# Altium PCB PCB.PcbDoc (part 2 of 2)
Units mm, origin at the board's own origin, x right, y up, seen from the top; angles counter-clockwise.
Board outline 43.18 x 17.78 mm, 4 copper layers (TOP, GND, SIG, BOTTOM), stack 1.586 mm thick; 70 components, 66 nets, 305 pads, 129 vias.
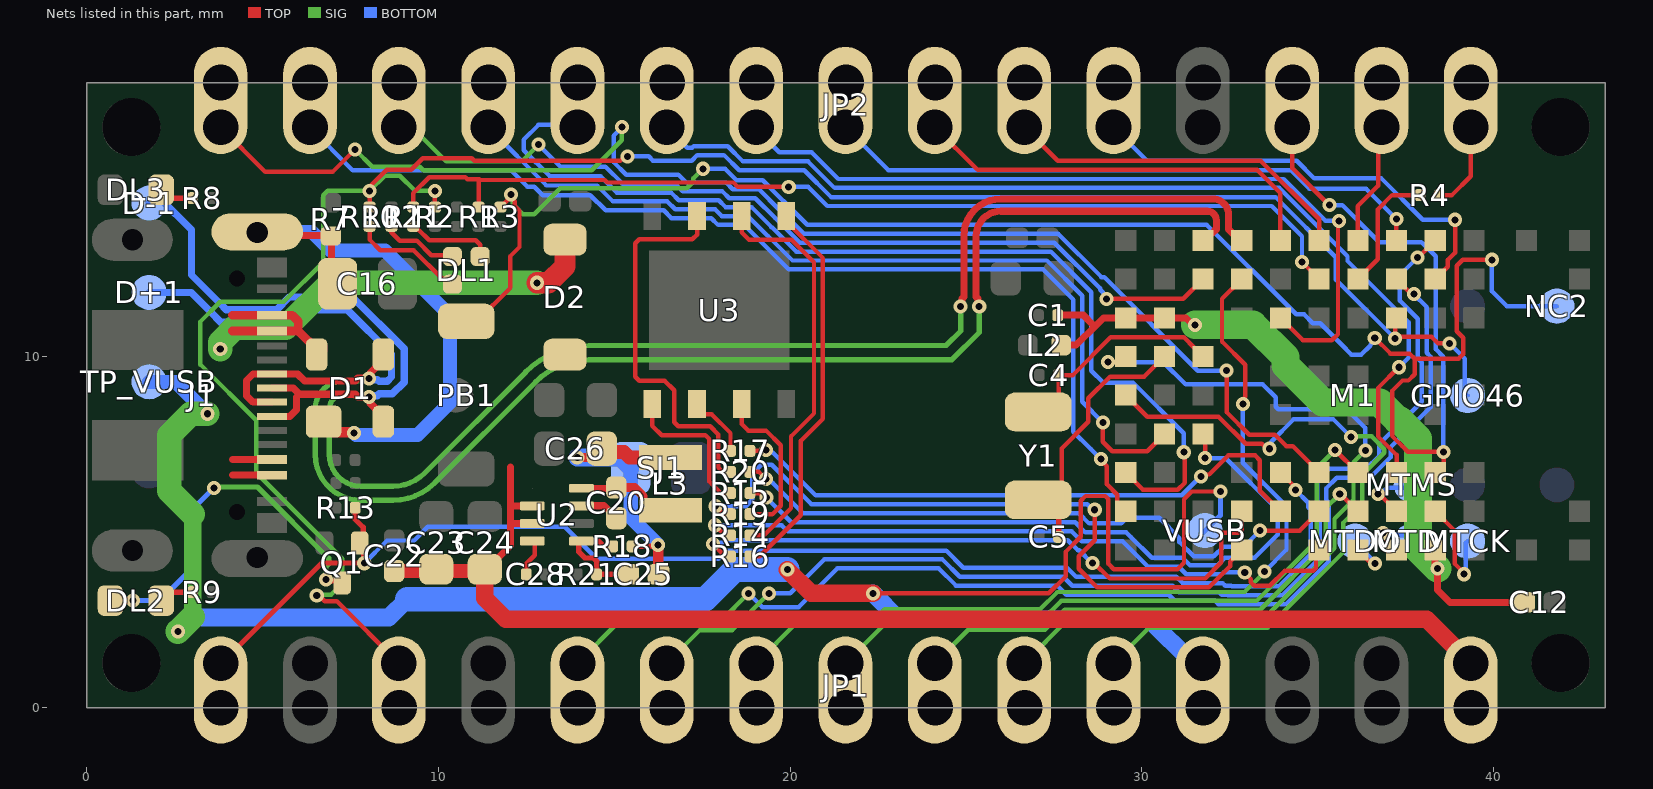
[diagram p4: the nets of this part, all layers, seen from the top]

## Via types
v1: diameter 0.4, hole 0.2, TOP to BOTTOM, tented both sides, 129 vias

## Nets (pads, with @x,y where several pads share a name; then routed paths per layer and width w, separated by ;. In a path a pad name is that pad's centre, name@x,y a point inside that pad or via, vN(x,y) a via of type N, cw(c..) or ccw(c..) an arc to the next point about the centre after c; other vN are vias at no path point) (continued)
GPIO2_1: JP1.5 M1.H8 | length 34
  TOP w0.127: M1.H8@37.243,12.19 37.668,11.764 v1(37.735,11.764)
  SIG w0.127: JP1.5@13.955,1.27 15.176,2.491 18.053,2.491 v1(18.818,3.256)
  BOTTOM w0.127: v1(18.818,3.256) 19.209,2.865 20.244,2.865 21.344,3.965 24.227,3.965 24.715,3.478 27.598,3.478 27.856,3.22 28.222,3.22 28.225,3.216 28.969,3.216 28.973,3.22 30.77,3.22 30.95,3.04 32.085,3.04 32.173,2.952 34.111,2.952 35.316,4.156 35.316,5.837 35.238,5.915 35.238,6.238 35.54,6.54 36.488,6.54 37.08,7.132 37.08,7.415 38.21,8.545 38.21,9.988 38.103,10.095 38.103,11.396 v1(37.735,11.764)
GPIO3_1: JP1.6 M1.J9 | length 32.2
  TOP w0.127: v1(37.84,12.807) 37.859,12.807 M1.J9@38.343,13.29
  SIG w0.127: JP1.6@16.495,1.27 17.438,2.213 18.358,2.213 v1(19.401,3.256)
  BOTTOM w0.127: v1(19.401,3.256) 20.008,3.256 20.972,4.219 24.333,4.219 24.82,3.732 27.768,3.732 28.026,3.474 28.327,3.474 28.33,3.47 28.864,3.47 28.868,3.474 30.875,3.474 31.055,3.294 32.191,3.294 32.268,3.216 32.436,3.216 32.446,3.206 34.005,3.206 35.062,4.262 35.062,5.732 34.984,5.81 34.984,6.462 35.316,6.794 36.383,6.794 36.747,7.158 36.747,7.494 37.956,8.704 37.956,9.831 37.892,9.895 37.892,9.948 37.849,9.99 37.849,11.064 37.34,11.574 37.34,12.306 v1(37.84,12.807)
GPIO4_1: JP1.7 M1.D8 | length 25.2
  TOP w0.127: M1.D8@32.843,12.19 32.281,11.628 32.281,10.415 32.937,9.758 32.937,8.847 32.926,8.837 32.926,8.689 v1(32.874,8.637)
  SIG w0.127: JP1.7@19.035,1.27 20.212,2.447 22.335,2.447 22.687,2.8 27.107,2.8 27.601,3.294 32.923,3.294 33.486,3.857 v1(33.486,3.872)
  BOTTOM w0.127: v1(32.874,8.637) 32.874,6.971 34.114,5.731 34.114,4.5 v1(33.486,3.872)
GPIO5_1: JP2.5 M1.J8 | length 12.7
  TOP w0.127: M1.J8@38.343,12.19 38.698,12.545 38.698,12.735 38.906,12.943 38.906,13.871 v1(38.9,13.877)
  BOTTOM w0.127: JP2.5@29.195,16.51 30.147,15.557 34.402,15.557 34.907,15.053 36.814,15.053 37.99,13.877 v1(38.9,13.877)
GPIO6_1: JP2.6 M1.F9 | length 10.1
  TOP w0.127: JP2.6@26.655,16.51 27.607,15.557 33.376,15.557 35.043,13.891 M1.F9@35.043,13.29
GPIO7_1: JP2.7 M1.E9 | length 12
  TOP w0.127: JP2.7@24.115,16.51 25.332,15.293 33.281,15.293 33.943,14.632 M1.E9@33.943,13.29
  BOTTOM w0.127: JP2.7@24.115,16.51 JP2.7@24.169,16.51
GPIO8_1: JP2.8 M1.H9 | length 17.4
  TOP w0.127: v1(37.238,13.901) 37.238,13.294 M1.H9@37.243,13.29
  BOTTOM w0.127: JP2.8@21.575,16.51 22.523,15.562 22.795,15.29 34.231,15.29 34.767,14.754 36.386,14.754 v1(37.238,13.901)
GPIO9_1: JP2.9 M1.E7 | length 22.9
  TOP w0.127: M1.E7@33.943,11.09 34.582,10.451 35.403,10.451 35.579,10.627 35.579,13.812 v1(35.605,13.839)
  BOTTOM w0.127: JP2.9@19.035,16.51 19.035,16.453 19.691,15.796 20.611,15.796 21.371,15.036 34.034,15.036 35.215,13.855 35.589,13.855 v1(35.605,13.839)
GPIO10_1: JP2.10 M1.H3 | length 28.4
  TOP w0.127: M1.H3@37.243,6.69 37.243,7.192 36.718,7.716 36.718,9.094 v1(37.308,9.684)
  BOTTOM w0.127: JP2.10@16.495,16.51 17.079,15.926 17.213,15.926 17.259,15.972 18.226,15.972 18.661,15.537 20.511,15.537 21.266,14.782 33.904,14.782 35.849,12.837 35.849,12.706 37.595,10.959 37.595,9.971 v1(37.308,9.684)
GPIO11_1: JP1.8 M1.G3 | length 18.5
  TOP w0.127: v1(35.488,7.329) 35.504,7.329 M1.G3@36.143,6.69
  SIG w0.127: JP1.8@21.575,1.27 22.781,2.476 27.143,2.476 27.706,3.04 33.261,3.04 34.971,4.75 34.971,6.812 v1(35.488,7.329)
GPIO12_1: JP1.9 M1.G2 | length 14.8
  TOP w0.127: v1(35.629,6.077) 35.656,6.077 M1.G2@36.143,5.59
  SIG w0.127: JP1.9@24.115,1.27 25.067,2.222 27.248,2.222 27.812,2.786 33.366,2.786 35.225,4.644 35.225,5.673 v1(35.629,6.077)
GPIO13_1: JP1.10 M1.A6 | length 22.8
  TOP w0.127: v1(29.034,9.829) 29.382,9.829 M1.A6@29.543,9.99
  SIG w0.127: JP1.10@26.655,1.27 27.917,2.532 33.471,2.532 35.479,4.539 35.479,5.375 36.019,5.915 36.019,6.983 v1(36.356,7.32)
  BOTTOM w0.127: v1(29.034,9.829) 30.614,9.829 31.248,9.195 33.441,9.195 33.807,8.829 33.807,8.565 33.883,8.49 35.824,8.49 36.356,7.958 v1(36.356,7.32)
GPIO14_1: JP1.11 M1.A5 | length 20
  TOP w0.127: M1.A5@29.543,8.89 30.152,8.281 32.181,8.281 32.953,7.508 33.417,7.508 33.558,7.367 v1(33.628,7.367)
  SIG w0.127: JP1.11@29.195,1.27 30.203,2.278 33.577,2.278 35.733,4.434 35.733,5.269 36.273,5.81 36.273,6.625 36.897,7.249 36.897,7.355 36.533,7.719 35.969,7.719 v1(35.949,7.7)
  BOTTOM w0.127: v1(33.628,7.367) 33.68,7.42 33.68,7.567 34.312,8.199 35.449,8.199 v1(35.949,7.7)
GPIO17_1: JP2.11 M1.A3 | length 28.8
  TOP w0.127: M1.A3@29.543,6.69 30.033,6.2 31.021,6.2 31.217,6.396 31.217,7.244 v1(31.194,7.268)
  BOTTOM w0.127: JP2.11@13.955,16.51 13.891,16.573 12.846,16.573 12.43,16.158 12.43,15.854 13.173,15.111 14.611,15.111 15.07,14.652 16.615,14.652 16.838,14.429 17.973,14.429 18.164,14.238 18.904,14.238 19.471,13.671 19.476,13.671 20.174,12.973 27.408,12.973 28.562,11.82 28.562,11.412 28.562,9.588 28.9,9.25 29.75,9.25 31.194,7.806 v1(31.194,7.268)
GPIO18_1: JP2.12 M1.B4 | length 25.3
  TOP w0.127: v1(28.893,8.115) 28.893,7.567 29.161,7.3 30.152,7.3 M1.B4@30.643,7.79
  BOTTOM w0.127: JP2.12@11.415,16.51 13.073,14.852 14.511,14.852 14.965,14.398 16.51,14.398 16.733,14.175 17.868,14.175 18.059,13.984 18.799,13.984 19.366,13.417 19.371,13.417 20.069,12.719 27.303,12.719 28.308,11.714 28.308,11.307 28.308,8.701 v1(28.893,8.115)
GPIO21_1: JP2.13 M1.C8 | length 25.8
  TOP w0.127: JP2.13@8.875,16.51 9.064,16.51 JP2.13@9.106,16.467 ; v1(28.997,11.629) 31.182,11.629 M1.C8@31.743,12.19
  SIG w0.127: JP2.13@8.875,16.51 8.985,16.4 9.359,16.4 10.219,15.541 12.377,15.541 12.843,16.006 v1(12.843,16.018)
  BOTTOM w0.127: v1(12.843,16.018) 13.472,15.389 14.752,15.389 15.235,14.906 16.72,14.906 16.943,14.683 18.078,14.683 18.269,14.492 19.01,14.492 19.576,13.925 19.581,13.925 20.28,13.227 27.514,13.227 28.816,11.925 28.816,11.884 28.997,11.703 v1(28.997,11.629)
GPIO27_1: M1.F2 R20.1 | length 17.9
  TOP w0.127: R20.1@18.857,6.707 19.114,6.707 v1(19.318,6.504) ; v1(33.363,5.041) 34.494,5.041 M1.F2@35.043,5.59
  BOTTOM w0.127: v1(19.318,6.504) 19.391,6.504 19.5,6.395 19.507,6.395 20.367,5.535 28.207,5.535 28.5,5.243 29.417,5.243 29.579,5.404 30.496,5.404 31.071,4.829 31.071,4.714 31.476,4.31 32.048,4.31 32.323,4.584 32.906,4.584 v1(33.363,5.041)
GPIO28_1: M1.D1 R19.1 | length 20
  TOP w0.127: v1(17.882,5.733) 18.108,5.507 R19.1@18.307,5.507 ; v1(28.662,5.633) 28.662,4.765 28.207,4.31 28.207,3.953 28.735,3.424 31.905,3.424 32.513,4.032 32.513,4.161 M1.D1@32.843,4.49
  BOTTOM w0.127: v1(17.882,5.733) 18.742,5.733 18.927,5.918 18.927,6.665 19.178,6.916 19.481,6.916 20.608,5.789 28.445,5.789 28.602,5.633 v1(28.662,5.633)
GPIO29_1: M1.C4 R15.1 | length 20.3
  TOP w0.127: R15.1@18.857,6.107 19.126,6.107 19.258,5.976 v1(19.332,5.976) ; M1.C4@31.743,7.79 31.8,7.733 v1(31.8,7.1)
  BOTTOM w0.127: v1(19.332,5.976) 20.033,5.275 28.108,5.275 28.395,4.989 29.559,4.989 29.695,4.852 ; 29.695,4.852 30.279,4.267 31.159,4.267 31.371,4.056 32.153,4.056 32.365,4.267 33.206,4.267 33.86,4.921 33.86,5.626 32.385,7.1 v1(31.8,7.1)
GPIO30_1: M1.F1 R14.1 | length 19.2
  TOP w0.127: v1(17.871,5.191) 18.088,4.974 18.239,4.974 R14.1@18.307,4.907 ; v1(32.927,3.85) 32.927,3.832 33.104,3.655 33.104,3.565 33.194,3.475 33.642,3.475 34.059,3.892 34.879,3.892 34.953,3.967 34.953,4.401 M1.F1@35.043,4.49
  BOTTOM w0.127: v1(17.871,5.191) 19.757,5.191 19.928,5.021 28.003,5.021 28.289,4.735 29.453,4.735 30.174,4.013 31.054,4.013 31.266,3.802 32.279,3.802 32.328,3.851 v1(32.927,3.85) ; v1(32.927,3.85) v1(32.927,3.85)
GPIO31_1: M1.E2 R17.1 | length 17.3
  TOP w0.127: R17.1@18.857,7.307 18.866,7.317 19.308,7.317 v1(19.318,7.326) ; v1(31.68,6.583) 31.732,6.635 31.918,6.635 32.464,7.181 33.221,7.181 33.358,7.044 33.358,6.175 M1.E2@33.943,5.59
  BOTTOM w0.127: v1(19.318,7.326) 19.37,7.274 19.494,7.274 20.725,6.043 31.14,6.043 v1(31.68,6.583)
GPIO32_1: M1.D2 R16.1 | length 17.7
  TOP w0.127: v1(17.812,4.661) 17.812,4.655 18.082,4.385 18.228,4.385 R16.1@18.307,4.307 ; v1(28.597,4.115) 28.65,4.115 29.086,3.678 31.8,3.678 32.259,4.137 32.259,4.94 32.3,4.981 32.768,4.981 32.843,5.055 M1.D2@32.843,5.59
  BOTTOM w0.127: v1(17.812,4.661) 17.851,4.7 18.076,4.7 18.143,4.767 27.898,4.767 28.184,4.481 28.218,4.481 28.584,4.115 v1(28.597,4.115)
GPIO38_1: JP2.14 M1.A2 | length 30.4
  TOP w0.127: v1(28.837,7.071) 28.837,7.04 29.008,6.869 29.008,6.355 29.306,6.057 29.306,5.827 M1.A2@29.543,5.59
  BOTTOM w0.127: JP2.14@6.35,16.51 6.35,16.5 7.569,15.28 12.072,15.28 12.533,14.819 12.729,14.819 12.971,14.578 14.321,14.578 14.755,14.144 16.405,14.144 16.628,13.921 17.762,13.921 17.953,13.73 18.694,13.73 19.959,12.465 27.198,12.465 28.054,11.609 28.054,7.854 28.544,7.364 v1(28.837,7.071)
GPIO39_1: M1.J2 MTCK.X | length 3.1
  TOP w0.127: M1.J2@38.343,5.59 38.904,5.028 38.904,4.091 39.165,3.831 v1(39.165,3.8)
  BOTTOM w0.127: v1(39.165,3.8) 39.214,3.849 39.214,4.692 MTCK.X@39.263,4.741
GPIO40_1: M1.G1 MTDO.X | length 1.5
  TOP w0.127: M1.G1@36.143,4.49 36.471,4.162 36.573,4.162 v1(36.626,4.109)
  BOTTOM w0.127: MTDO.X@36.063,4.741 36.063,4.707 36.626,4.144 v1(36.626,4.109)
GPIO41_1: M1.H1 MTDI.X | length 1.4
  TOP w0.127: v1(36.862,4.973) 36.914,4.921 36.914,4.818 M1.H1@37.243,4.49
  BOTTOM w0.127: v1@37.001,4.908 37.496,4.908 MTDI.X@37.663,4.741
GPIO42_1: M1.H2 MTMS.X | length 1.8
  TOP w0.127: v1(36.712,6.075) 36.758,6.075 M1.H2@37.243,5.59
  BOTTOM w0.127: v1(36.712,6.075) 36.786,6.075 36.973,6.261 37.583,6.261 MTMS.X@37.663,6.341
GPIO43_1: M1.G8 R4.2 | length 3.6
  TOP w0.127: M1.G8@36.143,12.19 36.705,12.752 36.705,14.17 37.115,14.58 R4.2@37.906,14.58
GPIO44_1: JP2.2 M1.G9 | length 3.5
  TOP w0.127: M1.G9@36.143,13.29 36.143,14.268 36.724,14.85 36.724,16.419 JP2.2@36.815,16.51
GPIO45_1: M1.F8 R1.1 R11.1 | length 28.7
  TOP w0.127: R11.1@9.284,14.29 9.284,14.637 9.738,15.091 10.769,15.091 10.826,15.034 11.165,15.034 ; R1.1@11.144,14.24 11.144,15.008 14.731,15.008 14.802,14.937 18.389,14.937 18.515,14.811 v1(19.961,14.811) ; v1(34.555,12.678) M1.F8@35.043,12.19
  BOTTOM w0.127: v1(19.961,14.811) 20.518,14.811 21.06,14.269 33.699,14.269 34.555,13.413 v1(34.555,12.678)
GPIO46_1: GPIO46.X JP1.3 M1.H7 R2.1 R10.1 | length 59.8
  TOP w0.127: v1(6.543,3.199) 6.597,3.199 6.766,3.03 7.115,3.03 JP1.3@8.875,1.27 ; R10.1@8.044,14.39 8.044,14.815 8.529,15.3 9.229,15.3 9.556,15.626 10.952,15.626 11.02,15.557 12.652,15.557 12.659,15.55 15.168,15.55 15.298,15.68 v1(15.372,15.68) ; v1(9.9,14.7) 9.902,14.698 9.902,14.242 R2.1@9.904,14.24 ; v1(37.205,10.5) 37.205,11.052 M1.H7@37.243,11.09 ; v1@37.253,10.546 38.239,10.546 38.422,10.363 v1(38.748,10.363)
  SIG w0.127: v1(6.543,3.199) 6.559,3.215 6.948,3.215 7.27,3.537 7.27,4.238 4.819,6.689 4.819,8.178 3.236,9.761 3.236,10.984 3.799,11.547 5.599,11.547 6.724,12.672 6.724,14.571 6.853,14.7 v1(8.04,14.7) 8.472,15.132 8.905,15.132 9.337,14.7 v1(9.9,14.7)
  BOTTOM w0.127: v1(15.372,15.68) 15.978,15.68 16.1,15.557 17.203,15.557 17.364,15.718 18.121,15.718 18.556,15.283 20.406,15.283 21.165,14.523 33.804,14.523 35.518,12.809 35.518,12.178 37.197,10.5 v1(37.205,10.5) ; v1(38.748,10.363) 39.188,9.923 39.188,8.956 GPIO46.X@39.263,8.881
GPIO47_1: JP2.15 M1.F3 | length 38.7
  TOP w0.127: JP2.15@3.81,16.51 5.082,15.238 6.992,15.238 v1(7.629,15.875) ; v1(32.414,9.586) 32.42,9.58 32.42,8.4 33.058,7.762 33.785,7.762 34.104,7.444 34.289,7.444 M1.F3@35.043,6.69
  SIG w0.127: v1(7.629,15.875) 8.118,15.386 9.47,15.386 9.569,15.287 14.36,15.287 15.214,16.141 15.214,16.499 v1(15.225,16.51)
  BOTTOM w0.127: v1(15.225,16.51) 14.981,16.266 14.981,15.519 15.34,15.16 16.826,15.16 17.048,14.937 18.183,14.937 18.374,14.746 19.115,14.746 19.682,14.179 19.687,14.179 20.385,13.481 27.619,13.481 28.852,12.248 28.93,12.248 31.592,9.586 v1(32.414,9.586)
GPIO48_1: JP1.1 M1.E3 Q1.G R13.2 | length 38.2
  TOP w0.127: M1.E3@33.943,6.69 34.368,6.264 v1(34.368,6.192)
  TOP w0.15: JP1.1@3.81,1.27 3.833,1.27 6.683,4.12 v1@7.886,4.12 ; R13.2@7.637,5.69 7.637,5.36 7.862,5.134 7.862,4.69 7.881,4.671 7.881,4.125 v1@7.886,4.12 ; v1(7.894,4.112) v1@7.886,4.12
  BOTTOM w0.127: v1(7.894,4.112) 8.54,4.758 9.311,4.758 9.698,5.145 13.595,5.145 14.5,4.24 17.975,4.24 18.208,4.473 24.438,4.473 24.925,3.986 27.873,3.986 28.131,3.728 28.432,3.728 28.436,3.724 28.759,3.724 28.763,3.728 30.98,3.728 31.16,3.548 32.296,3.548 32.373,3.47 32.541,3.47 32.552,3.46 33.9,3.46 34.808,4.367 34.808,5.627 34.73,5.704 34.73,5.83 v1(34.368,6.192)
NetC1_2: C1.2 C12.2 L2.2 M1.A7 M1.B7 M1.J1 | length 20.9
  TOP w0.2: C1.2@27.61,11.164 28.338,11.164 28.611,10.89 28.71,10.89 ; L2.2@27.71,10.314 28.133,10.314 28.71,10.89 ; v1(31.514,10.891) 31.46,10.891 31.262,11.09 28.909,11.09 28.71,10.89 ; M1.J1@38.343,4.49 38.343,3.965 38.357,3.965 v1@38.373,3.949 ; v1(38.411,3.965) 38.411,3.353 38.764,3 C12.2@40.865,3
  SIG w0.8: v1(31.514,10.891) 33.162,10.891 34.083,9.97 34.083,9.742 35.144,8.681 36.766,8.681 37.265,8.182 37.326,8.182 37.856,7.652 37.856,4.52 v1(38.411,3.965)
NetC4_1: C4.1 M1.C6 Y1.2 | length 5.4
  TOP w0.127: Y1.2@27.635,8.839 C4.1@27.635,9.464 28.042,9.464 29.12,10.542 31.191,10.542 31.506,10.226 M1.C6@31.738,9.995
NetC5_1: C5.1 M1.B6 Y1.1 | length 6.7
  TOP w0.127: Y1.1@27.251,5.914 27.721,6.384 27.721,7.374 28.481,8.135 28.481,8.799 29.102,9.42 30.073,9.42 M1.B6@30.643,9.99
  TOP w0.15: C5.1@27.635,4.864 Y1.1@27.635,5.477
NetC20_1: C20.1 L3.1 U2.8 | length 2.9
  TOP w0.15: C20.1@14.8,6.236 14.893,6.33 C20.1@14.893,6.363
  TOP w0.2: U2.8@14.075,6.236 C20.1@14.8,6.236
  TOP w0.25: C20.1@14.893,6.363 14.994,6.263 15.579,6.263 15.823,6.019 15.823,5.843 16.048,5.618 L3.1@16.498,5.618
NetC20_2: C20.2 U2.7 | length 1.1
  TOP w0.2: U2.7@14.072,5.747 14.706,5.747 C20.2@15.059,5.393
NetC25_1: C25.1 R18.1 R21.2 U2.5 | length 3.2
  TOP w0.15: R18.1@14.959,4.593 14.71,4.593 14.56,4.743 13.993,4.743 13.993,4.432 14.166,4.259 14.412,4.259 14.5,4.172 R21.2@14.5,3.797 C25.1@15.39,3.797
NetC25_2: C25.2 C26.2 L3.2 R18.2 SJ1.1 | length 8.4
  TOP w0.15: R18.2@15.509,4.593 16.214,4.593 v1(16.251,4.63)
  TOP w0.25: v1(13.95,7.118) C26.2@14.648,7.118
  TOP w0.3: v1(16.251,4.63) 16.255,4.625 16.255,3.802 C25.2@16.26,3.797
  TOP w0.4: C26.2@14.648,7.468 14.845,7.271 15.283,7.271 15.436,7.118 L3.2@16.498,7.118
  BOTTOM w0.4: SJ1.1@15.47,6.82 15.47,5.411 v1(16.251,4.63)
  BOTTOM w0.5: v1(13.95,7.118) 15.172,7.118 SJ1.1@15.47,6.82
NetC28_2: C28.2 U2.4 | length 1
  TOP w0.127: C28.2@12.5,3.797 12.5,4.1 12.743,4.343 U2.4@12.743,4.743
NetDL1_2: DL1.2 R10.2 | length 3.3
  TOP w0.127: R10.2@8.044,13.69 8.044,13.315 8.344,13.015 9.295,13.015 10.106,12.204 10.24,12.204 DL1.2@10.399,12.045
NetDL1_3: DL1.3 R12.2 | length 2.2
  TOP w0.127: R12.2@8.664,13.74 8.664,13.521 8.905,13.28 9.391,13.28 9.802,12.869 10.383,12.869 DL1.3@10.395,12.881
NetDL1_4: DL1.4 R11.2 | length 2.4
  TOP w0.127: R11.2@9.284,13.69 9.365,13.609 9.421,13.609 9.737,13.293 10.061,13.293 10.064,13.296 11.062,13.296 11.189,13.169 DL1.4@11.189,12.885
NetDL2_A: DL2.A R9.1 | length 1
  TOP w0.15: DL2.A@2.125,3.05 2.365,3.29 R9.1@3.016,3.29
NetDL2_C: DL2.C Q1.D | length 10.4
  TOP w0.15: v1(6.807,3.654) 6.855,3.607 7.183,3.607 Q1.D@7.227,3.651
  TOP w0.2: DL2.C@0.675,3.05 v1(1.317,3.05)
  SIG w0.15: v1(3.615,6.252) 3.641,6.277 4.855,6.277 6.88,4.253 6.88,4.095 6.807,4.022 v1(6.807,3.654)
  BOTTOM w0.15: v1(1.317,3.05) 2.081,3.05 3.054,4.023 3.054,5.69 v1(3.615,6.252)
NetDL3_A: DL3.A R8.1 | length 1
  TOP w0.15: DL3.A@2.125,14.73 2.365,14.49 R8.1@3.015,14.49
NetJP2_1: JP2.1 R4.1 | length 2.5
  TOP w0.127: R4.1@38.456,14.58 38.819,14.58 39.355,15.116 JP2.1@39.355,16.51
NetR14_2: R14.2 U3.6 | length 11.6
  TOP w0.127: U3.6@18.624,13.98 18.624,13.516 18.832,13.308 20.042,13.308 20.681,12.67 20.681,8.371 20.026,7.717 20.026,5.676 19.258,4.907 R14.2@18.857,4.907
NetR15_2: R15.2 U3.1 | length 4.3
  TOP w0.127: U3.1@16.084,8.64 16.084,8.016 16.348,7.752 17.594,7.752 17.704,7.642 17.704,6.439 18.036,6.107 R15.2@18.307,6.107
NetR16_2: R16.2 U3.5 | length 11.1
  TOP w0.127: R16.2@18.857,4.307 19.136,4.307 20.303,5.474 20.303,7.589 20.935,8.221 20.935,12.79 19.894,13.83 U3.5@19.894,13.98
NetR17_2: R17.2 U3.2 | length 1.9
  TOP w0.127: U3.2@17.354,8.64 17.354,8.53 17.541,8.343 17.776,8.343 18.307,7.813 R17.2@18.307,7.307
NetR19_2: R19.2 U3.3 | length 4.6
  TOP w0.127: U3.3@18.624,8.64 18.624,8.071 18.811,7.884 19.316,7.884 19.735,7.466 19.735,5.743 19.499,5.507 R19.2@18.857,5.507
NetR20_2: R20.2 U3.7 | length 11.1
  TOP w0.127: U3.7@17.354,13.98 17.354,13.454 17.221,13.321 15.709,13.321 15.598,13.209 15.598,9.416 15.709,9.304 16.431,9.304 16.706,9.03 16.706,8.118 16.817,8.006 17.726,8.006 17.96,7.772 17.96,6.835 18.088,6.707 R20.2@18.307,6.707
R\E\S\E\T\_1: JP2.3 M1.J3 NC2.X PB1.2 R3.1 | length 59.1
  TOP w0.127: PB1.2@10.794,10.99 11.094,10.99 12.05,11.946 12.05,12.847 12.307,13.104 12.307,14.137 12.177,14.267 12.177,14.406 12.066,14.517 v1@12.066,14.536 ; R3.1@11.764,14.24 11.77,14.24 v1@12.066,14.536 ; v1(12.066,14.591) v1@12.066,14.536 ; JP2.3@34.275,16.51 34.275,15.347 v1(35.331,14.292) ; v1(36.624,10.518) v1(36.624,10.518) 37.069,10.074 37.612,10.074 37.762,9.924 ; M1.J3@38.343,6.69 38.579,6.927 38.579,7.277 v1(38.583,7.28) 37.565,7.28 37.402,7.443 37.115,7.731 37.115,9.01 37.412,9.308 37.581,9.308 37.762,9.489 37.762,9.924 ; v1(39.953,12.74) v1(39.953,12.74) 39.124,12.741 38.952,12.569 38.952,10.711 39.138,10.525 39.138,10.059 39.009,9.931 37.769,9.931 37.762,9.924
  SIG w0.127: v1(12.066,14.591) 12.116,14.541 12.116,14.328 12.406,14.038 12.729,14.038 13.465,14.774 17.064,14.774 17.251,14.96 17.251,15.053 v1(17.526,15.328)
  BOTTOM w0.127: v1(17.526,15.328) 18.152,15.328 18.479,15 19.22,15 19.8,14.421 19.804,14.421 20.49,13.735 31.842,13.735 34.39,11.187 34.614,11.187 34.863,10.938 35.071,10.938 35.668,10.341 35.668,10.337 35.959,10.046 36.244,10.046 36.492,10.295 36.492,10.312 36.512,10.332 36.624,10.444 v1(36.624,10.518) ; v1(35.331,14.292) 35.705,14.292 36.755,13.242 37.951,13.242 37.995,13.197 38.002,13.197 38.357,12.842 38.357,10.201 38.573,9.985 38.573,7.29 v1(38.583,7.28) ; v1(39.953,12.74) 39.953,11.851 40.383,11.421 NC2.X@41.803,11.421
USB_D_1_N: D1.2 D-1.X J1.A7 J1.B7 M1.D9 | length 51.9
  TOP w0.2: J1.A7@5.276,8.29 5.783,8.29 5.967,8.475 5.967,8.834 6.053,8.92 ; J1.B7@5.276,9.09 5.883,9.09 ; v1(24.851,11.416) 24.889,11.454 24.889,11.634 24.939,11.684 24.939,13.418 cw(c25.992,13.418) 25.992,14.47 32.013,14.47 cw(c32.013,14.015) 32.468,14.015 32.468,13.607 32.585,13.49 32.643,13.49 M1.D9@32.843,13.29
  TOP w0.21: 5.883,9.09 6.053,8.92 7.634,8.92 7.711,8.842 v1(8.029,8.842) ; v1@8.065,8.658 8.438,8.285 D1.2@8.438,8.135
  SIG w0.15: v1(8.029,8.842) 7.656,8.842 7.602,8.896 7.296,8.896 ccw(c7.296,8.5) 6.9,8.5 6.9,7.2 ccw(c7.8,7.2) 7.8,6.3 8.7,6.3 ccw(c8.7,7.59) 9.611,6.677 12.488,9.554 cw(c14.29,7.752) 14.29,10.3 24.437,10.3 24.851,10.714 v1(24.851,11.416)
  BOTTOM w0.21: D-1.X@1.778,14.351 1.893,14.466 2.109,14.466 2.98,13.595 2.98,12.308 3.778,11.511 3.967,11.322 5.401,11.322 5.761,11.682 7.555,11.682 9.027,10.21 9.027,9.26 8.693,8.926 8.314,8.926 8.267,8.879 8.065,8.879 v1(8.029,8.842)
USB_D_1_P: D1.3 D+1.X J1.A6 J1.B6 M1.C9 | length 50.5
  TOP w0.2: J1.B6@5.276,8.69 4.725,8.69 4.541,8.875 4.541,9.305 4.725,9.49 J1.A6@5.276,9.49 6.007,9.49 ; v1(25.378,11.416) 25.34,11.454 25.34,11.634 25.289,11.684 25.289,13.418 cw(c25.992,13.418) 25.992,14.12 31.868,14.12 cw(c31.868,13.87) 32.118,13.87 32.118,13.607 32,13.49 31.943,13.49 M1.C9@31.743,13.29
  TOP w0.21: 6.007,9.49 6.205,9.292 7.634,9.292 7.711,9.369 v1(8.029,9.369) ; v1@8.065,9.522 8.438,9.895 D1.3@8.438,10.045
  SIG w0.15: v1(8.029,9.369) 8,9.34 cw(c7.894,9.446) 7.894,9.296 7.296,9.296 ccw(c7.296,8.5) 6.5,8.5 6.5,7.2 ccw(c7.8,7.2) 7.8,5.9 8.7,5.9 ccw(c8.7,7.59) 9.895,6.395 12.769,9.269 cw(c14.292,7.745) 14.292,9.9 24.602,9.9 25.378,10.676 v1(25.378,11.416)
  BOTTOM w0.21: D+1.X@1.778,11.811 2.969,11.811 3.181,11.599 3.523,11.256 3.818,10.962 5.55,10.962 5.91,11.322 7.406,11.322 8.667,10.061 8.667,9.409 8.544,9.286 8.314,9.286 8.267,9.333 8.065,9.333 v1(8.029,9.369)
USB_SHIELD_1: C16.2 D1.1 J1.SHIELD1 R7.2 | length 16.6
  TOP w0.2: J1.SHIELD1@4.93,13.431 R7.2@6.927,13.431 ; C16.2@6.962,12.211 R7.2@6.962,13.41
  TOP w0.3: D1.1@6.738,8.135 7.04,7.833 7.587,7.833 v1(7.606,7.814)
  TOP w0.4: J1.SHIELD1@4.851,13.51 J1.SHIELD1@4.93,13.431 ; R7.2@6.943,13.415 R7.2@6.958,13.415 ; C16.2@6.962,12.211 C16.2@7.133,12.04
  BOTTOM w0.4: J1.SHIELD1@4.851,13.51 4.876,13.535 6.407,13.535 6.94,13.002 8.484,13.002 10.33,11.156 10.33,8.687 9.402,7.759 7.662,7.759 v1(7.606,7.814)
VIN: C22.1 C23.2 C24.2 D2.C JP1.15 U2.2 U2.3 | length 36.7
  TOP w0.2: C22.1@8.838,3.835 C22.1@8.841,3.835 ; C24.2@11.32,3.942 11.37,3.942 12.047,4.619 12.047,5.24 ; 12.047,6.847 12.047,5.739 ; U2.3@12.665,5.24 12.047,5.24 ; U2.2@12.668,5.743 12.052,5.743 12.047,5.739 ; 12.047,5.24 12.047,5.739
  TOP w0.4: C22.1@8.741,3.835 8.795,3.888 9.94,3.888 C24.2@11.266,3.888
  TOP w0.5: C24.2@11.32,3.942 11.32,3.117 11.916,2.521 38.104,2.521 JP1.15@39.355,1.27
VUSB: D1.4 D2.A J1.A4 J1.A9 J1.B4 J1.B9 JP1.12 TP_VUSB.X VUSB.X | length 76.7
  TOP w0.127: v1(22.358,3.255) 27.355,3.255 27.844,3.744 27.844,4.443 28.266,4.865 28.266,5.89 28.4,6.024 28.964,6.024 29.052,5.936 29.052,4.095 29.203,3.944 31.015,3.944 31.2,4.129 31.2,5.933 31.419,6.152 v1(32.239,6.152)
  TOP w0.2: 4.141,6.615 J1.A9@5.276,6.615 ; 4.141,7.065 J1.B4@5.276,7.065 ; D1.4@6.538,10.045 D1.4@6.538,10.195
  TOP w0.25: 4.141,10.715 J1.B9@5.276,10.715 6.018,10.715 ; 4.141,11.165 J1.A4@5.276,11.165 5.842,11.165 6.018,10.989 6.018,10.715 ; D1.4@6.538,10.195 6.018,10.715
  TOP w0.4: D1.4@6.643,10.184 D1.4@6.643,10.257
  TOP w0.5: v1(19.921,3.933) 20.598,3.255 v1(22.358,3.255)
  TOP w0.6: v1(12.801,12.086) 13.132,12.086 13.6,12.555 D2.A@13.6,13.31
  SIG w0.5: 3.02,2.595 3.02,5.501
  SIG w0.7: v1(2.595,2.17) 3.02,2.595 ; 3.02,5.501 2.348,6.173 2.348,7.747 2.963,8.362 v1(3.434,8.362) ; v1(3.799,10.199) 3.799,10.399 4.215,10.815 5.663,10.815 6.935,12.086 v1(12.801,12.086)
  BOTTOM w0.15: VUSB.X@31.762,5 32.239,5.477 v1(32.239,6.152)
  BOTTOM w0.4: TP_VUSB.X@1.778,9.271 2.525,9.271 v1(3.434,8.362)
  BOTTOM w0.5: v1(2.595,2.17) 2.995,2.57 8.595,2.57 9.118,3.093 ; v1(22.358,3.255) 23.089,2.525 27.934,2.525 27.937,2.522 29.257,2.522 29.261,2.525 30.203,2.525 31.458,1.27 JP1.12@31.735,1.27
  BOTTOM w0.7: 9.118,3.093 17.593,3.093 18.432,3.933 v1(19.921,3.933)
pads on no net: Fiducial_1.1 J1.A8 J1.B8 J1.FIXING J1.SHIELD2 J1.SHIELD3 J1.SHIELD4 M1.A4 M1.B1 M1.B3 M1.B5 M1.B9 M1.C1 M1.C2 M1.C5 M1.D3 M1.D7 M1.E1 M1.G4 M1.G5 M1.G7 M1.J4 M1.J5 M1.J7 M1.K1 M1.K9 NC1.X U2.6

## Polygon pours and split planes (outlines as drawn)
GND on TOP "GND_2" (solid, remove dead copper, pour order 8): 0,17.78 0,0 43.18,0 43.18,17.78
VIN on TOP "NONET_L-01_P-001" (solid, remove dead copper, pour order 5): 14.283,10.82 14.283,9.91 13.26,9.91 12.431,9.081 12.431,5.618 11.679,5.618 11.42,5.877 11.42,10.12 12.1,10.8
VUSB on TOP "NONET_L-01_P-001" (solid, remove dead copper, pour order 7): 5.941,11.358 5.941,6.427 3.241,6.427 3.241,11.358
GND on SIG "GND_2" (solid, remove dead copper, pour order 14): 0,17.78 0,0 43.18,0 43.18,17.78
+3V3 on SIG "+3V3_L03_P009" (solid, remove dead copper, pour order 9): 6.692,14.7 29.8,14.7 30.7,13.8 30.7,12 29,10.3 26.805,10.3 26.805,11.107 27.2,11.502 27.2,12.7 26.9,13 6.8,13 6.7,13.1
+3V3 on SIG "NONET_L-01_P-001" (solid, remove dead copper, pour order 13): 4.974,0.27 6.495,0.27 7.854,0.27 7.854,2.183 8.473,2.792 13.295,2.792 14.78,4.277 15.895,4.277 15.895,6.983 15.895,8.746 14.759,8.746 14.759,7.373 11.662,4.277 6.998,4.277 4.974,2.253
+3V3 on SIG "+3V3_L03_P006" (solid, remove dead copper, pour order 6): 14.759,8.556 26.251,8.556 26.8,9.105 26.8,10.6 28.971,10.6 28.971,7.1 14.759,7.1
GND on BOTTOM "GND_2" (solid, remove dead copper, pour order 12): 0,17.78 0,0 43.18,0 43.18,17.78
VUSB on BOTTOM "NONET_L-01_P-001" (solid, remove dead copper, pour order 2): 3.306,1.77 3.619,2.2 9.425,2.2 9.495,2.27 18.995,2.27 20.495,3.77 20.495,4.27 8.651,4.27 7.888,3.507 3.022,3.507 2.09,2.575 2.09,1.98 2.235,1.77
GND on GND "GND_2" (solid, remove dead copper, pour order 0): 0,17.78 0,0 43.18,0 43.18,17.78

## Keep-outs
TOP:
  region: 40.2,10.37 40.627,10.37 40.633,12.241 40.2,12.241 40.2,12.319 43.18,12.319 43.18,5.461 40.2,5.461
BOTTOM:
  rectangle: 15.111,7.563 16.89,7.711
Keep-Out Layer:
  rectangle: 40.3,8.89 43.18,12.844
  rectangle: 40.3,4.936 43.18,8.89

## Other copper
TOP:
  pour cut-out: 6.4,14.3 6.4,12.8 4.9,12.8 4.9,11.5 3.1,11.5 3.1,6.021 4.726,6.021 4.726,5 6.3,5 6.3,3.562 0,3.562 0,14.28
GND:
  pour cut-out: 6.4,14.3 6.4,12.8 4.9,12.8 4.9,11.5 3.218,11.5 3.218,6.021 4.9,6.021 4.9,5.152 6.3,5.152 6.3,3.476 0,3.476 0,14.3
SIG:
  pour cut-out: 6.4,14.3 6.4,12.8 4.9,12.8 4.9,11.5 3.1,11.5 3.1,6.021 4.726,6.021 4.726,5 6.3,5 6.3,3.562 0,3.562 0,14.28
BOTTOM:
  pour cut-out: 6.4,14.3 6.4,12.8 4.9,12.8 4.9,11.5 3.1,11.5 3.1,6.021 4.726,6.021 4.726,5 6.3,5 6.3,3.562 0,3.562 0,14.28
  text "3" at 9.865,5.62 h0.8
  text "0" at 11.313,5.62 h0.8
  text "V" at 12.255,5.616 h0.8
  text "." at 10.563,5.47 h0.8

## Silkscreen, mask and mechanical layers (free items; w line width, h text height)
Top Overlay:
  drawing of 101 lines, arcs and shapes, not listed
Bottom Overlay:
  drawing of 231 lines, arcs and shapes, not listed
Route Tool Path:
  lines w2: -1,1 -1,0 ccw(c0,0) 0,-1 43.18,-1 ccw(c43.18,0) 44.18,0 44.18,6.5 ; -1,5 -1,13 ; -1,17 -1,17.78 cw(c0,17.78) 0,18.78 43.18,18.78 cw(c43.18,17.78) 44.18,17.78 44.18,10.5
Board:
  the board outline again, w0.1
Mechanical 7:
  lines w0.1: 1.193,11.811 1.778,11.811 ; 1.193,14.351 1.778,14.351 ; 1.778,11.226 1.778,11.811 ; 1.778,12.396 1.778,11.811 ; 1.778,13.766 1.778,14.351 ; 1.778,14.936 1.778,14.351 ; 2.363,11.811 1.778,11.811 ; 2.363,14.351 1.778,14.351
AZUKI_TESTPOINTS:
  drawing of 156 lines, arcs and shapes, not listed
Nano_MECHANICAL_QUOTES_TP:
  drawing of 309 lines, arcs and shapes, not listed
  text "D12" at 3.435,15.14 h0.3
  text "D11" at 6.025,15.14 h0.3
  text "D10" at 8.515,15.14 h0.3
  text "D9" at 11.18,15.14 h0.3
  text "D9" at 11.18,15.14 h0.3
  text "D8" at 13.72,15.14 h0.3
  text "D7" at 16.26,15.14 h0.3
  text "D6" at 18.8,15.14 h0.3
  text "D5" at 21.325,15.14 h0.3
  text "D4" at 23.865,15.14 h0.3
  text "D3" at 26.42,15.14 h0.3
  text "D2" at 28.96,15.14 h0.3
  text "GND" at 31.35,15.14 h0.3
  text "NRST" at 33.74,15.14 h0.3
  text "D1" at 36.63,15.14 h0.3
  text "D0" at 39.12,15.14 h0.3
  text "RX" at 36.58,14.54 h0.3
  text "TX" at 39.12,14.54 h0.3
  text "USB DN" at 2.5,14.11 h0.3
  text "USB DP" at 2.5,11.261 h0.3
  text "GND" at 37.663,11.271 h0.3
  text "D13" at 40.228,11.271 h0.3
  text "D13" at 37.688,8.731 h0.3
  text "D13" at 40.228,8.731 h0.3
  text "D13" at 37.688,6.191 h0.3
  text "D13" at 40.228,6.191 h0.3
  text "VUSB" at 31.245,5.791 h0.3
  text "D13" at 3.435,3.02 h0.3
  text "VREF OR" at 7.89,3.02 h0.3
  text "VBUS" at 31.2,3.02 h0.3
  text "NRST OR" at 33.29,3.02 h0.3
  text "SCK" at 3.41,2.42 h0.3
  text "OTHER" at 8.19,2.42 h0.3
  text "5V" at 31.5,2.42 h0.3
  text "OTHER" at 33.59,2.42 h0.3
  text "3V3" at 5.95,2.32 h0.3
  text "A0" at 11.18,2.32 h0.3
  text "A0" at 11.18,2.32 h0.3
  text "A1" at 13.77,2.32 h0.3
  text "A2" at 16.26,2.32 h0.3
  text "A3" at 18.8,2.32 h0.3
  text "A6" at 26.42,2.32 h0.3
  text "A7" at 28.96,2.32 h0.3
  text "GND" at 36.43,2.32 h0.3
  text "VIN" at 38.995,2.32 h0.3
  text "A4" at 21.325,2.311 h0.3
  text "A5" at 23.865,2.311 h0.3

## Dimensions
0,0 to 1.778,11.811 on Mechanical 16
0,0 to 3.81,1.27 on Mechanical 16
0,0 to 1.27,1.27 on Mechanical 16
0,0 to 1.27,16.51 on Mechanical 16
0,0 to 1.81,14.66 on Mechanical 16
0,0 to 1.778,11.811 on Mechanical 16
0,0 to 1.27,1.27 on Mechanical 16
0,0 to 0,17.78 on Mechanical 16
0,0 to 43.18,0 on Mechanical 16